# Altium PCB MC34063Inverting.PcbDoc
Units mm, origin at the board's own origin, x right, y up, seen from the top; angles counter-clockwise.
Board outline 26 x 50 mm, 2 copper layers (Top Layer, Bottom Layer); 18 components, 7 nets, 56 pads, 93 vias.
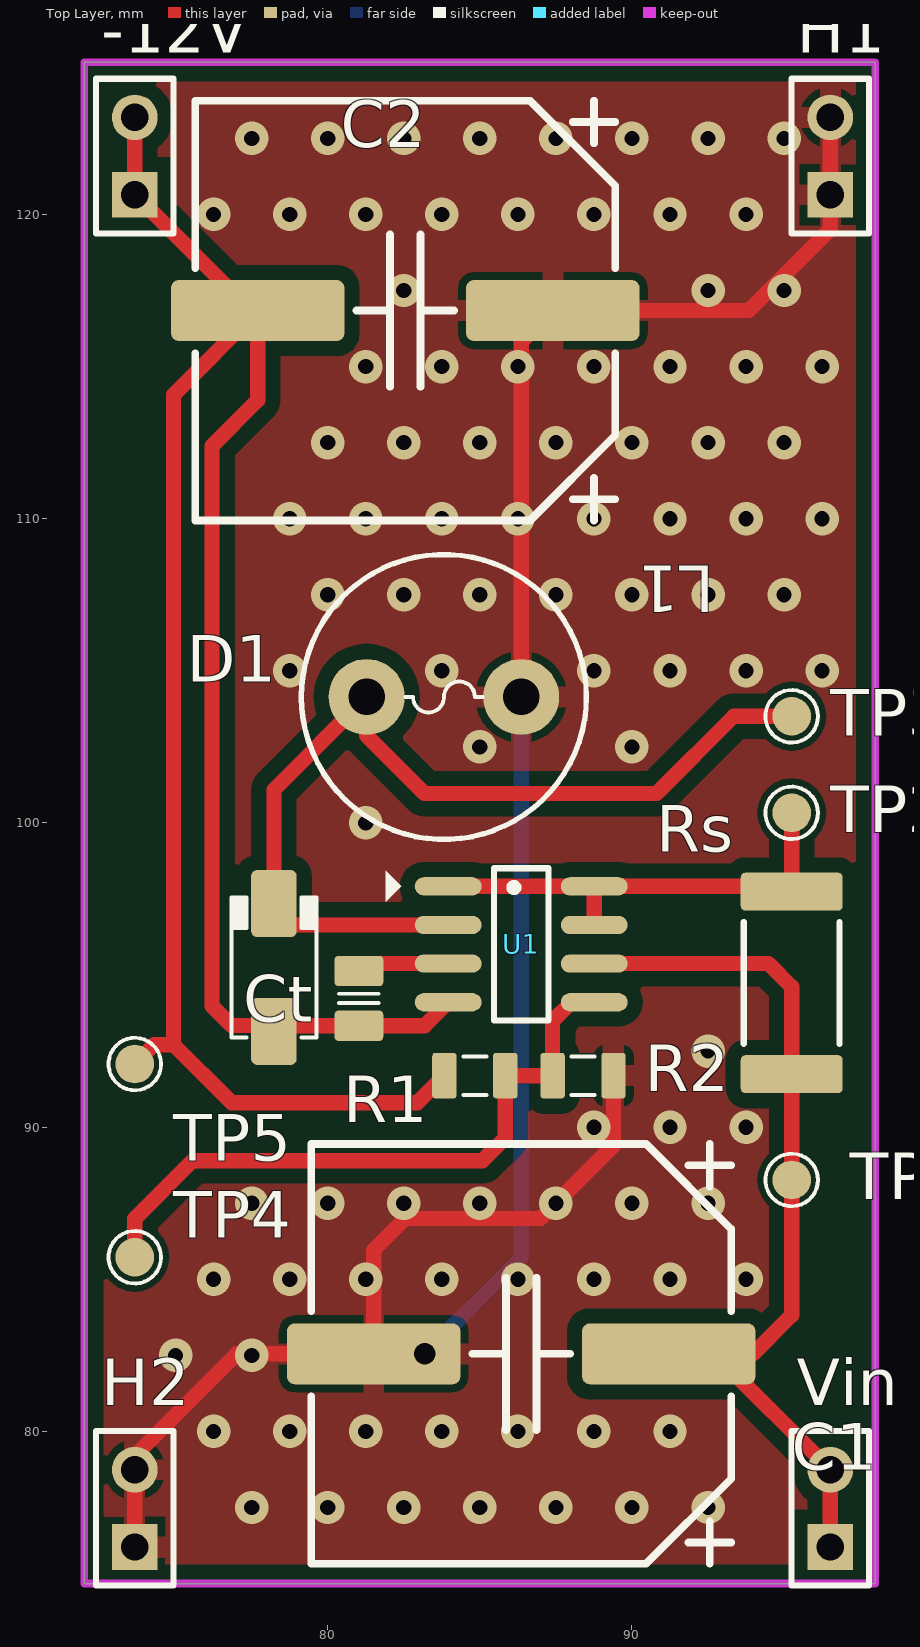
[diagram p0: Top Layer view]
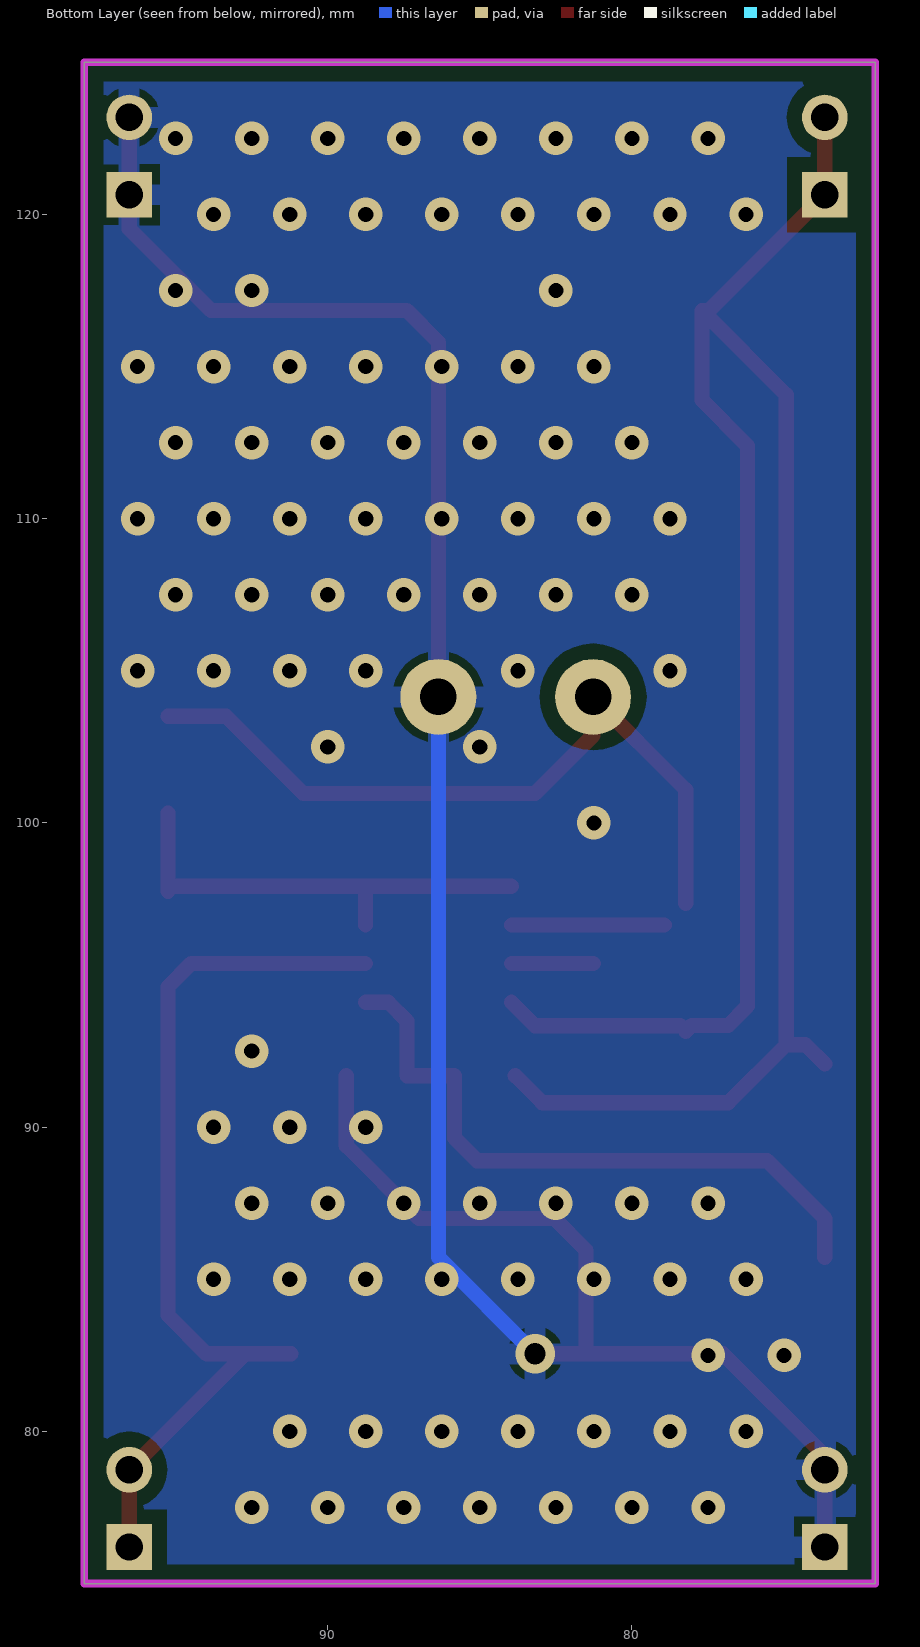
[diagram p1: Bottom Layer view, seen from below]
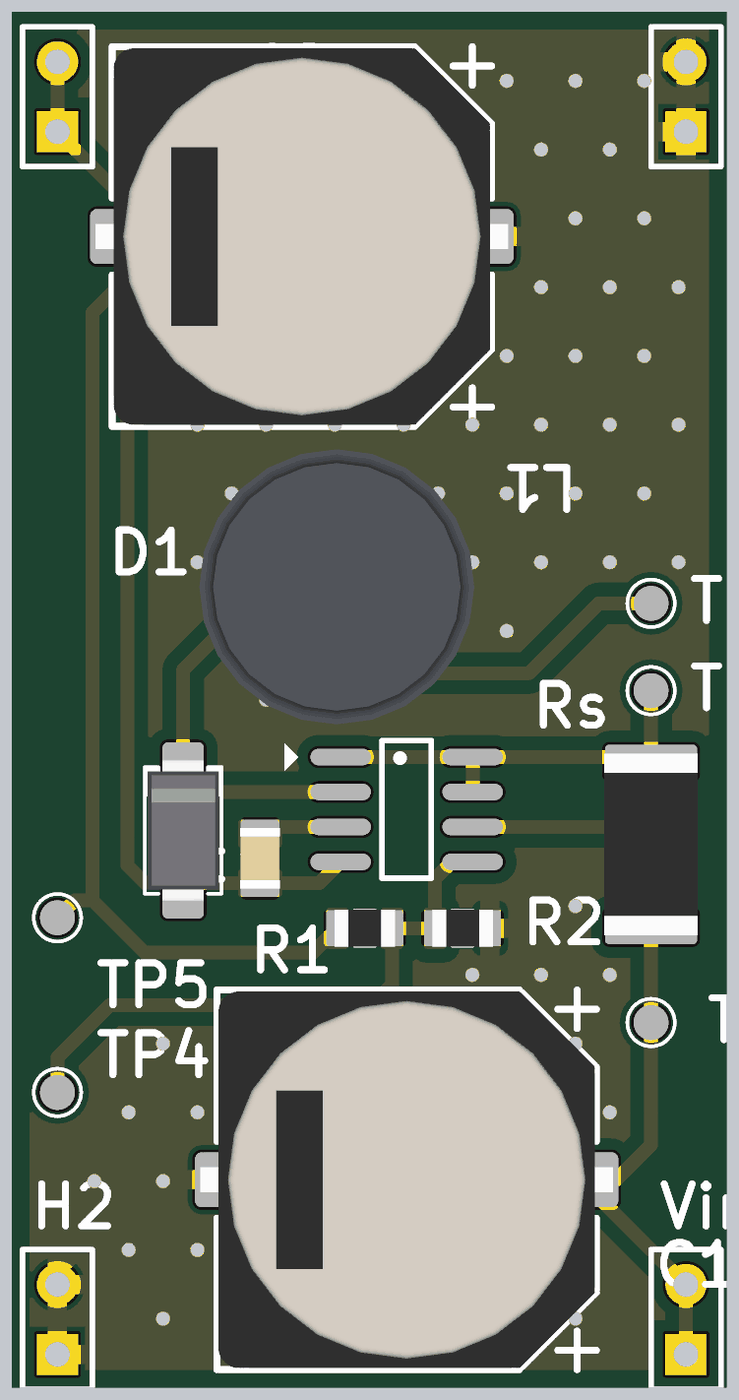
[diagram p2: 3D render of the assembled board from above, using the file's embedded part models]

## Layer stack, top to bottom
Top Solder: solder mask 0.0102, Solder Resist, Dk 3.5
Top Layer: signal copper 0.0356
Dielectric1: dielectric 0.32, FR-4, Dk 4.8
Bottom Layer: signal copper 0.0356
Bottom Solder: solder mask 0.0102, Solder Resist, Dk 3.5

## Board outline
72,75 98,75 98,125 72,125

## Design rules (kind name [scope] priority, off if disabled: settings)
Clearance GND [InPolygon vs InNet('GND')] p1: gap=0.1
Clearance [All] p2: gap=0.5
HoleSize [All] p1: absolutevalues=TRUE maxlimit=5 minlimit=0.6 maxpercent=80.000 minpercent=20.000
MinimumSolderMaskSliver [All] p1: minsoldermaskwidth=0.3
PlaneConnect [All] p1: planeconnectstyle=Relief reliefexpansion=0.5 reliefentries=4 reliefconductorwidth=0.7 reliefairgap=0.3
PolygonConnect [All] p1: connectstyle=Relief reliefconductorwidth=0.7 reliefentries=4 polygonreliefangle="90 Angle" airgapwidth=0.254
RoutingVias [All] p1: holewidth=0.7 width=1.3 viastyle="Through Hole" minholewidth=0.6 minwidth=1.1 maxholewidth=5 maxwidth=5
SilkToSolderMaskClearance SilkscreenOverComponentPads [IsPad] p1: minsilkscreentomaskgap=0.254 clearancetoexposedcopper=TRUE
SolderMaskExpansion [All] p1: expansion=0.102
Width Vout [InNet('VOUT')] p1: maxlimit=1 minlimit=0.4 preferedwidth=0.5
Width Power [InNet('POWER')] p2: maxlimit=1 minlimit=0.4 preferedwidth=0.5
Width [All] p3: maxlimit=5 minlimit=0.3 preferedwidth=0.5
26 further rules are at their usual default settings.

## Components (designator, comment, footprint, x,y, rotation, side; value= is the part's Value field where it differs from the comment)
-12V "-12V" HDR1X2 73.66,120.65 r90 top
C1 "Cap" CAP_ELEC_SIZE_H13 86.36,82.55 r90 top
C2 "Cap" CAP_ELEC_SIZE_H13 82.55,116.84 r90 top
Ct "CAP NP" CAPC2012N_F 81.026,94.234 r90 top
D1 "SS34" DO-214AC 78.232,95.25 r90 top
H1 "GND" HDR1X2 96.52,120.65 r90 top
H2 "GND" HDR1X2 73.66,76.2 r90 top
L1 "Inductor" "Inductor C8x10" 83.82,104.14 r0 top
R1 "Res" RESC2012N_F 84.836,91.694 r180 top
R2 "Res" RESC2012N_F 88.392,91.694 r180 top
Rs "Res" RESC6332N 95.25,94.742 r90 top
TP1 "TESTPOINT" TP-R60 95.25,88.265 r0 top
TP2 "TESTPOINT" TP-R60 95.25,100.33 r90 top
TP3 "TESTPOINT" TP-R60 95.25,103.505 r90 top
TP4 "TESTPOINT" TP-R60 73.66,85.725 r90 top
TP5 "TESTPOINT" TP-R60 73.66,92.075 r90 top
U1 "MC34063" "SO 8" 86.36,96.012 r0 top
Vin "Vin" HDR1X2 96.52,76.2 r90 top

## Footprints (in the part's own frame and the unit in brackets; to place one, negate y for a bottom-side part, rotate by r counter-clockwise, add the part's x,y. Pads: shape width x height; smd on the part's side, far side on the other; paste and mask are expansions set on the pad)
CAP_ELEC_SIZE_H13 [mm] "Capacitor, polarized, aluminum can; 12.5x13.5mm DxH"
  round 0.508 on Mech14: 0(0,0)
  rrect25% 2x5.7 smd: 1(0,-4.85) 2(0,4.85)
  silkscreen extent -6.9,-6.9 6.9,6.9, body extent -6.85,-7.5 6.85,7.5, height 14
CAPC2012N_F [mm] "Chip Capacitor, Body 2.0x1.2mm, 0805, IPC Medium Density, for Flex circuits"
  round 0.254 on Mech14: 0(0,0)
  rrect25% 1.2x1.4 on Top Solder: 1(-0.9,0) 1(0.9,0)
  rrect25% 1x1.6 smd paste-1: 1(-0.9,0) 2(0.9,0)
  rrect25% 1x1.4 on Top Paste: 1(-0.9,0) 1(0.9,0)
  Top Layer pour cut-out: -0.4,0.8 0.4,0.8 0.4,-0.8 -0.4,-0.8
  silkscreen extent -0.15,-0.65 0.15,0.65, body extent -1.1,-0.72 1.1,0.73, height 1.34
DO-214AC [mm] "JEDEC DO214 variation AC. SMA"
  round 0.508 on Mech14: 0(0,0)
  rrect25% 2.2x1.5 smd: A(-2.1,0) K(2.1,0)
  silkscreen extent -2.3,-1.4 2.3,1.4, body extent -2.6,-1.3 2.6,1.3, height 2.42
HDR1X2 [mm] "Connector; Header; 2 Position"
  rect 1.5x1.5 hole 0.9: 1(0,0)
  round 1.5 hole 0.9: 2(2.54,0)
  silkscreen extent -1.27,-1.27 3.81,1.27
"Inductor C8x10" [mm]
  round 2.5 hole 1.2: 1(-2.54,0) 2(2.54,0)
  silkscreen extent -4.68,-4.68 4.68,4.68, body extent -5,-5.04 5,4.96, height 12.02
RESC2012N_F [mm] "Chip Resistor, Body 2.0x1.2mm, 0805, IPC Medium Density"
  round 0.254 on Mech14: 0(0,0)
  rrect25% 1x1.3 on Top Solder: 1(-1,0) 1(1,0)
  rrect25% 0.8x1.5 smd paste-1: 1(-1,0) 2(1,0)
  rrect25% 0.8x1.3 on Top Paste: 1(-1,0) 1(1,0)
  Top Layer pour cut-out: -0.6,0.75 0.6,0.75 0.6,-0.75 -0.6,-0.75
  silkscreen extent -0.38,-0.64 0.38,0.64, body extent -1.1,-0.67 1.1,0.68, height 0.69
RESC6332N [mm] "Chip Resistor, Body 6.3x3.2mm, 2512, IPC Medium Density"
  round 1 on Mech14: 0(0,0)
  rrect25% 1.25x3.35 smd: 1(-3,0) 2(3,0)
  silkscreen extent -2,-1.58 2,1.58, body extent -3.3,-1.7 3.3,1.7, height 0.69
"SO 8" [mm]
  oval 2.2x0.6 smd: 1(-2.4,1.905) 2(-2.4,0.635) 3(-2.4,-0.635) 4(-2.4,-1.905) 5(2.4,-1.905) 6(2.4,-0.635) 7(2.4,0.635) 8(2.4,1.905)
  silkscreen extent -4.44,-2.5 0.9,2.5, body extent -1.95,-2.45 1.95,2.45, height 1.75
TP-R60 [mm]
  round 1.27 smd: 1(0,0)
  silkscreen extent -0.86,-0.86 0.86,0.86, body extent -0.76,-0.76 0.76,0.76, height 0.25

## Part data
-12V H1 H2 Vin: library part "Header 2", "Header, 2-Pin"
D1: library part "Diode Schottky"
TP1 TP2 TP3 TP4 TP5: "SMD test pin"

## Via types
v1: diameter 1.1, hole 0.5, Top Layer to Bottom Layer, tented both sides, 92 vias
v2: diameter 1.3, hole 0.7, Top Layer to Bottom Layer, 1 vias

## Nets (pads, with @x,y where several pads share a name; then routed paths per layer and width w, separated by ;. In a path a pad name is that pad's centre, name@x,y a point inside that pad or via, vN(x,y) a via of type N, cw(c..) or ccw(c..) an arc to the next point about the centre after c; other vN are vias at no path point)
-12V: -12V.1 -12V.2 C2.2 Ct.1@81.026,93.334 D1.A R1.2 TP5.1 U1.4 | length 77.1
  Top Layer w0.5: TP5.1 74.295,92.71 74.93,92.71 ; -12V.2 -12V.1 77.47,116.84 C2.2 ; -12V.2@74,123.19 -12V.2@74,123.54 ; D1.A 78.037,93.345 76.835,93.345 76.2,93.98 76.2,112.395 77.7,113.895 C2.2 ; D1.A@78.416,93.334 81.026,93.334 83.187,93.334 U1.4 ; R1.2 82.947,90.805 76.835,90.805 74.93,92.71 ; 74.93,92.71 74.93,114.07 C2.2
CT: Ct.2 U1.3 | length 2.7
  Top Layer w0.5: Ct.2@81.269,95.377 U1.3
FB: R1.1@85.836,91.694 R2.2 TP4.1 U1.5 | length 21.6
  Top Layer w0.5: TP4.1 73.66,86.995 75.565,88.9 85.09,88.9 85.836,89.646 85.836,91.694 R2.2 87.392,93.488 88.011,94.107 U1.5
GND: C1.2 C2.1 H1.1 H1.2 H2.1 H2.2 L1.2 R2.1@89.392,91.694 | length 78.9
  Top Layer w0.5: H2.1 H2.2 73.66,79.2 77.01,82.55 C1.2 ; v2(83.185,82.55) C1.2 ; L1.2 86.36,115.8 C2.1 93.84,116.84 96.52,119.52 H1.1 H1.2 ; R2.1@89.392,91.694 89.392,89.392 86.995,86.995 82.55,86.995 81.51,85.955 C1.2
  Bottom Layer w0.5: v2(83.185,82.55) 86.36,85.725 L1.2
  other v1: 77.5,77.5 80,77.5 82.5,77.5 85,77.5 87.5,77.5 90,77.5 92.5,77.5 76.25,80 78.75,80 81.25,80 83.75,80 86.25,80 88.75,80 91.25,80 75,82.5 77.5,82.5 76.25,85 78.75,85 81.25,85 83.75,85 86.25,85 88.75,85 91.25,85 93.75,85 77.5,87.5 80,87.5 82.5,87.5 85,87.5 87.5,87.5 90,87.5 92.5,87.5 88.75,90 91.25,90 93.75,90 92.5,92.5 81.25,100 85,102.5 90,102.5 78.75,105 83.75,105 88.75,105 91.25,105 93.75,105 96.25,105 80,107.5 82.5,107.5 85,107.5 87.5,107.5 90,107.5 92.5,107.5 95,107.5 78.75,110 81.25,110 83.75,110 86.25,110 88.75,110 91.25,110 93.75,110 96.25,110 80,112.5 82.5,112.5 85,112.5 87.5,112.5 90,112.5 92.5,112.5 95,112.5 81.25,115 83.75,115 86.25,115 88.75,115 91.25,115 93.75,115 96.25,115 82.5,117.5 92.5,117.5 95,117.5 76.25,120 78.75,120 81.25,120 83.75,120 86.25,120 88.75,120 91.25,120 93.75,120 77.5,122.5 80,122.5 82.5,122.5 85,122.5 87.5,122.5 90,122.5 92.5,122.5 95,122.5
IPK: Rs.2 TP2.1 U1.1 U1.7 U1.8 | length 15
  Top Layer w0.5: U1.1 U1.8 ; U1.7 U1.8 ; Rs.2@95.075,97.917 U1.8 ; Rs.2 TP2.1
SWO: D1.K L1.1 TP3.1 U1.2 | length 30.2
  Top Layer w0.5: D1.K 78.232,101.092 L1.1 81.28,102.87 83.185,100.965 90.805,100.965 93.345,103.505 TP3.1 ; D1.K@78.935,96.647 U1.2
VIN: C1.1 Rs.1 TP1.1 U1.6 Vin.1 Vin.2 | length 30.1
  Top Layer w0.5: U1.6 94.488,95.377 95.25,94.615 Rs.1 TP1.1 95.25,83.82 93.98,82.55 C1.1@92.71,82.55 ; C1.1 C1.1@92.71,82.55 ; Vin.1 Vin.2 C1.1@92.71,82.55
pads on no net: C1.0 C2.0 Ct.0 Ct.1@81.026,93.334 Ct.1@81.026,95.134 D1.0 R1.0 R1.1@83.836,91.694 R1.1@85.836,91.694 R2.0 R2.1@87.392,91.694 R2.1@89.392,91.694 Rs.0

## Polygon pours and split planes (outlines as drawn)
GND on Top Layer "Top Layer-No Net" (solid, remove dead copper, pour order 0): 72,75 98,75 98,125 72,125
GND on Bottom Layer "Top Layer-No Net" (solid, remove dead copper, pour order 2): 72,75 98,75 98,125 72,125

## Keep-outs
Keep-Out Layer:
  the board outline again, w0.254